# EAGLE board CONNECTORS (EAGLE 4.09)

Size 160 x 100 mm. Coordinates in mm from the lower left corner, seen from the top.
Outline: 0,0 160,0 160,100 0,100 0,0
Copper layers used: 

## Footprints (pad centres in the part's own frame; a part is rotated, then mirrored left to right if it is on the bottom)
520425-3 = drill 0.889 round: 1 -3.175,8.001; 2 -1.905,5.461; 3 -0.635,8.001; 4 0.635,5.461; 5 1.905,8.001; 6 3.175,5.461 | hole 3.251: -5.08,-0.889; 5.08,-0.889
B3F-10XX = drill 1.016 long: 1 -3.251,2.261; 2 3.251,2.261; 3 -3.251,-2.261; 4 3.251,-2.261
AK500/2 = drill 1.321 offset: 1 -2.515,0; 2 2.515,0
AK500/3 = drill 1.321 offset: 1 -5.004,0; 2 0,0; 3 5.004,0
AK500/4 = drill 1.321 offset: 1 -7.518,0; 2 -2.489,0; 3 2.489,0; 4 7.518,0
AK500/5 = drill 1.321 offset: 1 -10.033,0; 2 -5.004,0; 3 0,0; 4 5.004,0; 5 10.008,0
AK500/6 = drill 1.321 offset: 1 -12.522,0; 2 -7.518,0; 3 -2.515,0; 4 2.515,0; 5 7.518,0; 6 12.522,0
AK500/7 = drill 1.321 offset: 1 -15.037,0; 2 -10.008,0; 3 -5.004,0; 4 0,0; 5 5.004,0; 6 10.008,0; 7 15.037,0
AK500/8 = drill 1.321 offset: 1 -17.526,0; 2 -12.497,0; 3 -7.518,0; 4 -2.489,0; 5 2.489,0; 6 7.518,0; 7 12.497,0; 8 17.526,0
AK500/9 = drill 1.321 offset: 1 -20.015,0; 2 -15.011,0; 3 -10.033,0; 4 -5.004,0; 5 0,0; 6 5.004,0; 7 10.033,0; 8 15.011,0; 9 20.015,0
AK500/10 = drill 1.321 offset: 1 -22.504,0; 2 -17.501,0; 3 -12.497,0; 4 -7.493,0; 5 -2.489,0; 6 2.489,0; 7 7.493,0; 8 12.497,0; 9 17.501,0; 10 22.504,0
F09H = drill 1.016 octagon: 1 -5.486,-1.27; 2 -2.743,-1.27; 3 0,-1.27; 4 2.743,-1.27; 5 5.486,-1.27; 6 -4.115,1.27; 7 -1.372,1.27; 8 1.372,1.27; 9 4.115,1.27 | hole 3.302: -12.522,0; 12.522,0

## Placement (x,y rotation side)
E$1  520425-3  [520425-3]  88.26,24.6 0 top
E$28  B3F-10XX  [B3F-10XX]  64.13,23.33 0 top
E$29  AK500/2  [AK500/2]  10.79,88.1 0 top
E$30  AK500/3  [AK500/3]  36.19,88.1 180 top
E$31  AK500/4  [AK500/4]  62.86,88.1 0 top
E$32  AK500/5  [AK500/5]  95.88,88.1 180 top
E$33  AK500/6  [AK500/6]  137.79,88.1 0 top
E$34  AK500/7  [AK500/7]  23.49,69.05 0 top
E$35  AK500/8  [AK500/8]  71.75,69.05 180 top
E$36  AK500/9  [AK500/9]  120.01,69.05 0 top
E$37  AK500/10  [AK500/10]  31.11,52.54 0 top
E$38  F09H  [F09H]  23.49,16.98 0 top

## Library data of the parts
E$1 = con-amp
E$28 = switch-omron
E$29-E$37 = con-ptr500
E$38 = con-subd